# Altium PCB FootSW_old.PcbDoc
Units mm, origin at the board's own origin, x right, y up, seen from the top; angles counter-clockwise.
Board outline 156 x 24.52 mm, 2 copper layers (Top Layer, Bottom Layer); 4 components, 6 nets, 30 pads, 0 vias.
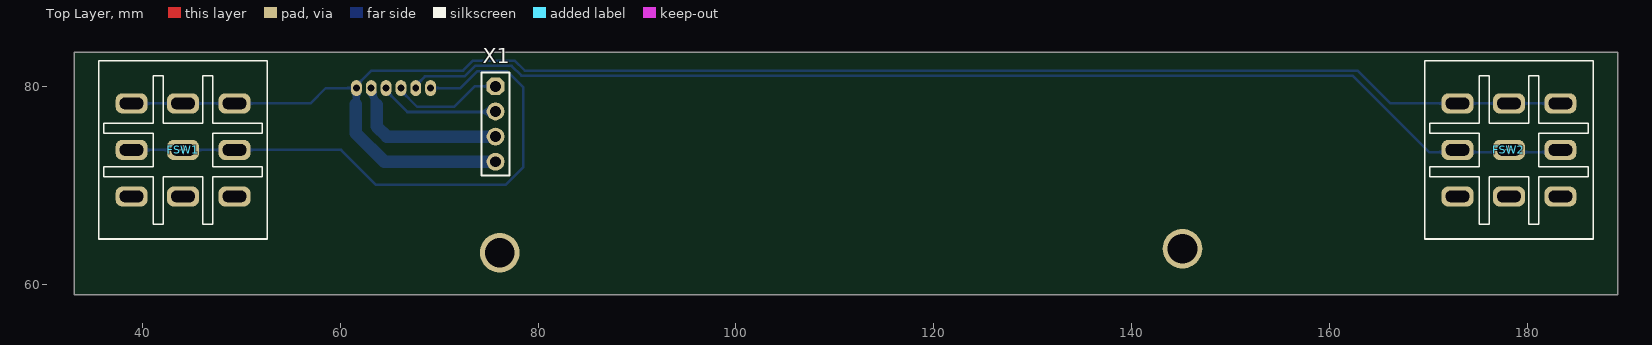
[diagram p0: Top Layer view]
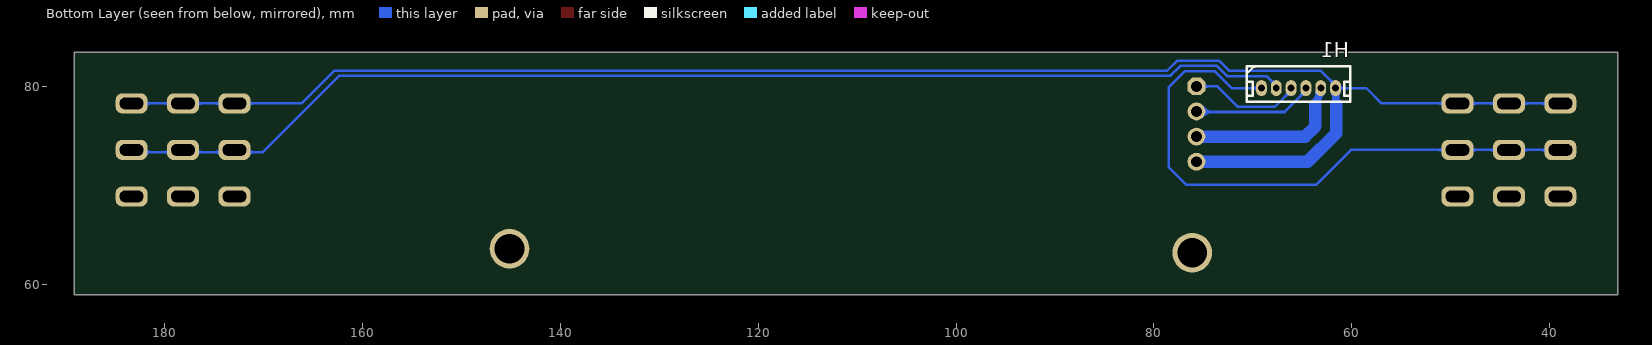
[diagram p1: Bottom Layer view, seen from below]
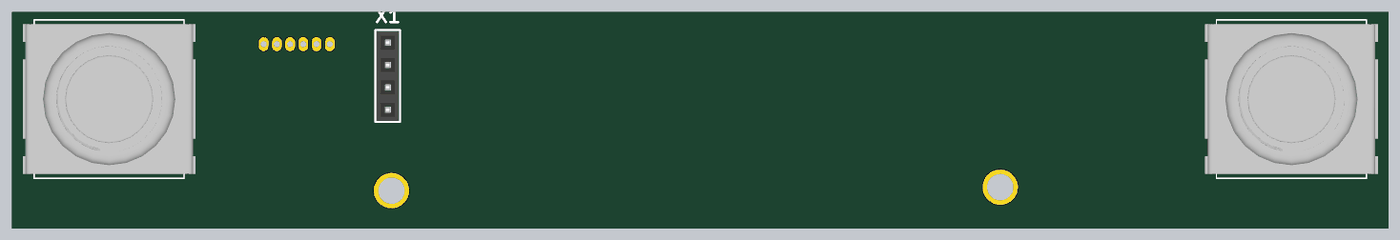
[diagram p2: 3D render of the assembled board from above, using the file's embedded part models]

## Layer stack, top to bottom
Top Solder: solder mask 0.0102, Solder Resist, Dk 3.5
Top Layer: signal copper 0.0356
Dielectric 1: dielectric 0.32, FR-4, Dk 4.8
Bottom Layer: signal copper 0.0356
Bottom Solder: solder mask 0.0102, Solder Resist, Dk 3.5

## Board outline
33.125,59 33.125,83.515 189.125,83.515 189.125,59

## Design rules (kind name [scope] priority, off if disabled: settings)
Clearance [All] p1: gap=0.254 ignorepadtopadclearanceinfootprint=FALSE except(0: Arc-Hole Track-Hole SMDPad-Hole THPad-Hole Via-Hole Fill-Hole Poly-Hole Region-Hole Text-Hole)
PolygonConnect [All] p1: connectstyle=Relief reliefconductorwidth=0.254 reliefentries=4 polygonreliefangle="90 Angle" airgapwidth=0.254
RoutingVias [All] p1: holewidth=0.711 width=1.27 viastyle="Through Hole" minholewidth=0.711 minwidth=1.27 maxholewidth=0.711 maxwidth=1.27
SolderMaskExpansion [All] p1: expansion=0.102 istentingtop=FALSE
Width [All] p1: maxlimit=1.27 minlimit=0.254 preferedwidth=0.254
30 further rules are at their usual default settings.

## Components (designator, comment, footprint, x,y, rotation, side; value= is the part's Value field where it differs from the comment)
FSW1 "FootSwitch" FOOTSW 38.925,78.335 r270 top
FSW2 "FootSwitch" FOOTSW 172.925,78.335 r270 top
H1 "1.5-6A" 1.5-6A 69.143,79.883 r180 bottom
X1 "Connector, 4pin, 2.54mm, 500VAC, 3A" "CON: PBS-4" 75.706,76.254 r270 top

## Footprints (in the part's own frame and the unit in brackets; to place one, negate y for a bottom-side part, rotate by r counter-clockwise, add the part's x,y. Pads: shape width x height; smd on the part's side, far side on the other; paste and mask are expansions set on the pad)
1.5-6A [mm] "Pin Header p=1.5mm, 6 pins"
  oval 1.1x1.6 hole 0.7: 1(0,0) 2(1.5,0) 3(3,0) 4(4.5,0) 5(6,0) 6(7.5,0)
  silkscreen extent -1.52,-1.4 9,2.2, body extent -1.4,-1.3 8.9,2.1, height 6
"CON: PBS-4" [mm] "PBS-5"
  oct 1.8x1.8 hole 1.1: 1(-3.81,0)
  round 1.8 hole 1.1: 2(-1.27,0) 3(1.27,0) 4(3.81,0)
  silkscreen extent -5.23,-1.4 5.2,1.4, body extent -5.08,-1.27 5.08,1.27, height 8.4
FOOTSW [mm]
  rrect60% 2x3.2 hole 1.2 slot 2.4 at 90 deg: 1(0,0) 2(4.7,0) 3(9.4,0) 4(0,5.2) 5(4.7,5.2) 6(9.4,5.2) 7(0,10.4) 8(4.7,10.4) 9(9.4,10.4)
  silkscreen extent -4.3,-3.3 13.7,13.7, body extent -3.81,-4.59 13.19,15.01, height 39.54

## Part data
H1: "Pin Header p=1.5mm, 6 pins"
X1: library part PBS-4, CurrentMax=3A, Manufacturer=Connfly, VoltageMax=500VAC, CommentText="\"Разъем\"", helpurl=https://www.chipdip.ru/product/pbs-4, Multichannel=4pin, PartNumber=PBS-4, Pitch=2.54mm, TypeConnector=Connector, ValueManufacturerPartNumber="Connector, 4pin, 2.54mm, 500VAC, 3A"

## Free pads (board coordinates)
  round 4 hole 3: 1(76.13,63.256) 1(145.129,63.652)

## Nets (pads, with @x,y where several pads share a name; then routed paths per layer and width w, separated by ;. In a path a pad name is that pad's centre, name@x,y a point inside that pad or via, vN(x,y) a via of type N, cw(c..) or ccw(c..) an arc to the next point about the centre after c; other vN are vias at no path point)
+5: H1.5 X1.3 | length 16.9
  Bottom Layer w0.635: H1.5@63.284,79.471 63.284,79.742 H1.5 63.143,79.633 63.682,78.177
  Bottom Layer w1.27: 63.682,78.177 63.682,76.018 64.716,74.984 X1.3
FOOT_L: FSW1.2 FSW1.5 FSW1.8 H1.1 | length 60.6
  Bottom Layer w0.254: FSW1.2 FSW1.5 FSW1.8 60.096,73.635 63.627,70.104 76.708,70.104 78.486,71.882 78.486,79.987 76.906,81.567 73.842,81.567 72.158,79.883 H1.1
FOOT_R: FSW2.2 FSW2.5 FSW2.8 H1.2 | length 120.5
  Bottom Layer w0.254: H1.2 67.643,80.133 68.574,81.064 72.572,81.064 73.638,82.13 77.337,82.13 78.314,81.153 162.306,81.153 170.053,73.406 172.925,73.406 178.125,73.406 183.096,73.406 FSW2.8
GND: FSW1.1 FSW1.4 FSW1.7 FSW2.1 FSW2.4 FSW2.7 H1.6 X1.4 | length 168
  Bottom Layer w0.254: FSW1.1 FSW1.4 FSW1.7 56.999,78.335 58.547,79.883 H1.6 61.643,80.133 63.171,81.661 72.421,81.661 73.433,82.673 77.644,82.673 78.656,81.661 162.814,81.661 166.14,78.335 FSW2.1 FSW2.4 FSW2.7
  Bottom Layer w0.635: 61.595,78.232 61.643,78.28 H1.6
  Bottom Layer w1.27: 61.595,78.232 61.595,75.311 64.462,72.444 X1.4
SCL\: H1.4 X1.2 | length 12.2
  Bottom Layer w0.254: H1.4 64.643,79.633 66.806,77.47 75.652,77.47 X1.2
SDA: H1.3 X1.1 | length 11.4
  Bottom Layer w0.254: H1.3 66.143,79.633 67.798,77.978 71.501,77.978 73.587,80.064 X1.1
pads on no net: FSW1.3 FSW1.6 FSW1.9 FSW2.3 FSW2.6 FSW2.9

## Silkscreen, mask and mechanical layers (free items; w line width, h text height)
outline:
  the board outline again, w0.025
Mechanical 4:
  circle w0.013: c75.981,89.255 r1.25
  circle w0.013: c76.13,63.256 r1.25
  circle w0.013: c144.98,89.652 r1.25
  circle w0.013: c145.129,63.652 r1.25
  lines w0.013: 33.125,83.515 55.125,83.515 55.125,65.515 167.125,65.515 167.125,83.515 189.125,83.515 ; 40.731,77.029 cw(c44.125,73.635) 47.519,70.241 ; 43.725,73.635 44.525,73.635 ; 44.125,68.835 cw(c44.125,73.635) 44.125,78.435 ; 44.125,73.235 44.125,74.035 ; 75.73,63.256 76.53,63.256 ; 76.13,62.856 76.13,63.656 ; 111.125,56.515 111.125,65.405 ; 144.729,63.652 145.529,63.652 ; 145.129,63.252 145.129,64.052 ; 177.725,73.635 178.525,73.635 ; 178.125,73.235 178.125,74.035 ; 74.526,81.447 76.885,71.06 ; 74.526,81.447 76.826,81.46 ; 74.526,81.447 74.586,71.047 ; 74.586,71.047 76.826,81.46 ; 74.586,71.047 76.885,71.06 ; 76.826,81.46 76.885,71.06 ; 35.125,65.135 35.125,82.135 53.125,82.135 53.125,65.135 35.125,65.135 ; 35.125,66.635 ccw(c36.625,66.635) 36.625,65.135 51.625,65.135 ccw(c51.625,66.635) 53.125,66.635 53.125,80.635 ccw(c51.625,80.635) 51.625,82.135 36.625,82.135 ccw(c36.625,80.635) 35.125,80.635 35.125,66.635 ; 36.125,70.935 36.125,71.935 41.125,71.935 41.125,75.335 36.125,75.335 36.125,76.335 41.125,76.335 41.125,81.135 42.125,81.135 42.125,76.335 46.125,76.335 46.125,81.135 47.125,81.135 47.125,76.335 52.125,76.335 52.125,75.335 47.125,75.335 47.125,71.935 52.125,71.935 52.125,70.935 47.125,70.935 47.125,66.135 46.125,66.135 46.125,70.935 42.125,70.935 42.125,66.135 41.125,66.135 41.125,70.935 36.125,70.935 ; 36.625,73.635 cw(c44.125,73.635) 38.822,78.938 cw(c44.125,73.635) 36.625,73.635 ; 73.467,91.741 73.645,60.741 147.643,61.166 147.465,92.166 73.467,91.741 ; 169.125,65.135 187.125,65.135 187.125,82.135 169.125,82.135 169.125,65.135 ; 169.125,66.635 ccw(c170.625,66.635) 170.625,65.135 185.625,65.135 ccw(c185.625,66.635) 187.125,66.635 187.125,80.635 ccw(c185.625,80.635) 185.625,82.135 170.625,82.135 ccw(c170.625,80.635) 169.125,80.635 169.125,66.635 ; 170.125,70.935 170.125,71.935 175.125,71.935 175.125,75.335 170.125,75.335 170.125,76.335 175.125,76.335 175.125,81.135 176.125,81.135 176.125,76.335 180.125,76.335 180.125,81.135 181.125,81.135 181.125,76.335 186.125,76.335 186.125,75.335 181.125,75.335 181.125,71.935 186.125,71.935 186.125,70.935 181.125,70.935 181.125,66.135 180.125,66.135 180.125,70.935 176.125,70.935 176.125,66.135 175.125,66.135 175.125,70.935 170.125,70.935 ; 178.125,68.835 cw(c178.125,73.635) 178.125,78.435 cw(c178.125,73.635) 178.125,68.835 ; 183.428,68.332 ccw(c178.125,73.635) 185.625,73.635 ccw(c178.125,73.635) 183.428,68.332